# Altium PCB YakupTrkn.PcbDoc
Units mil, origin at the board's own origin, x right, y up, seen from the top; angles counter-clockwise.
Board outline 2010 x 2210 mil, 2 copper layers (Top Layer, Bottom Layer); 62 components, 57 nets, 268 pads, 44 vias.
Unrouted connection lines stored in the file: 4.
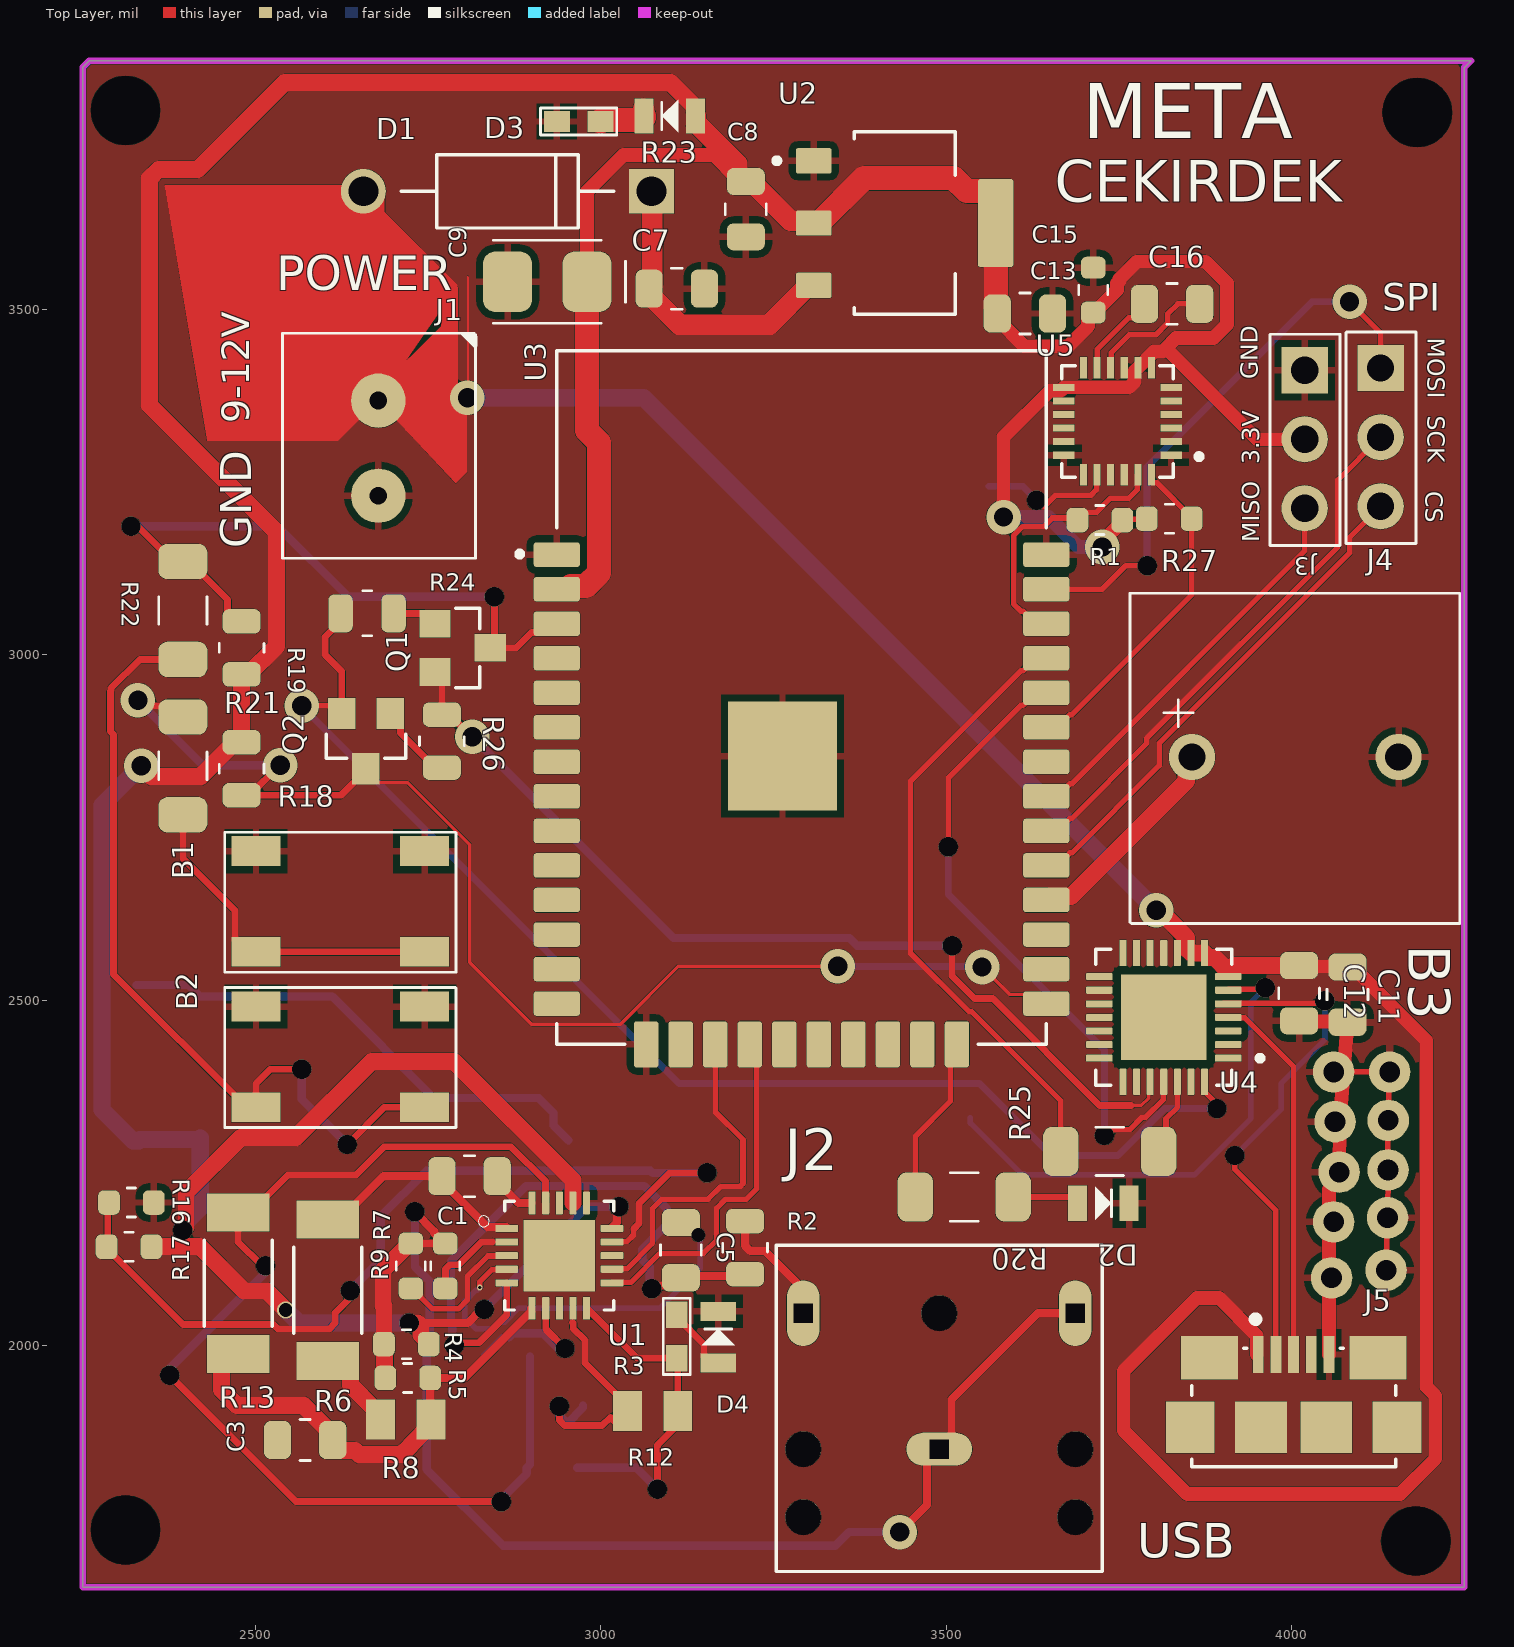
[diagram p0: Top Layer view]
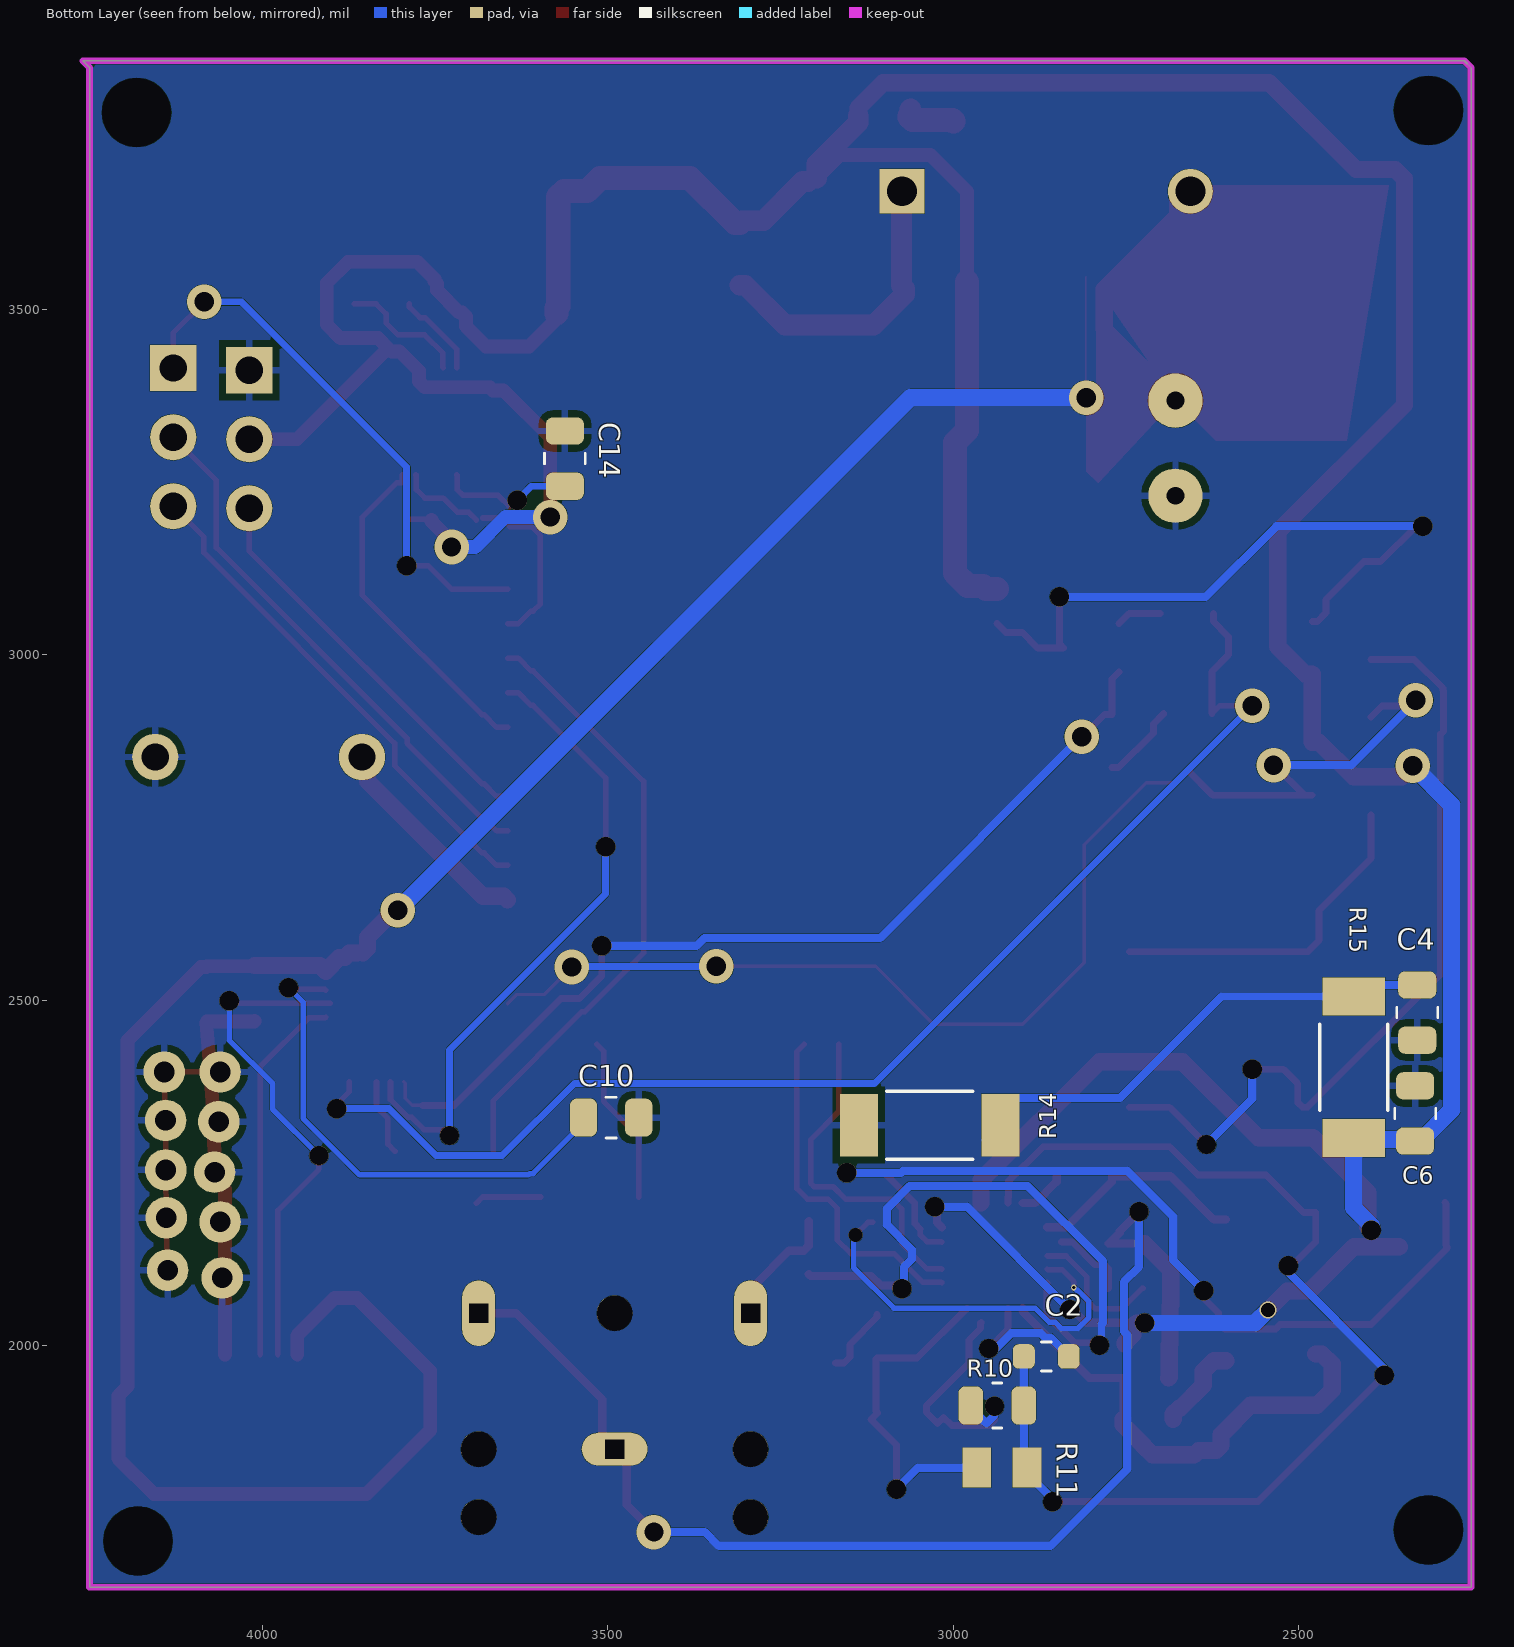
[diagram p1: Bottom Layer view, seen from below]
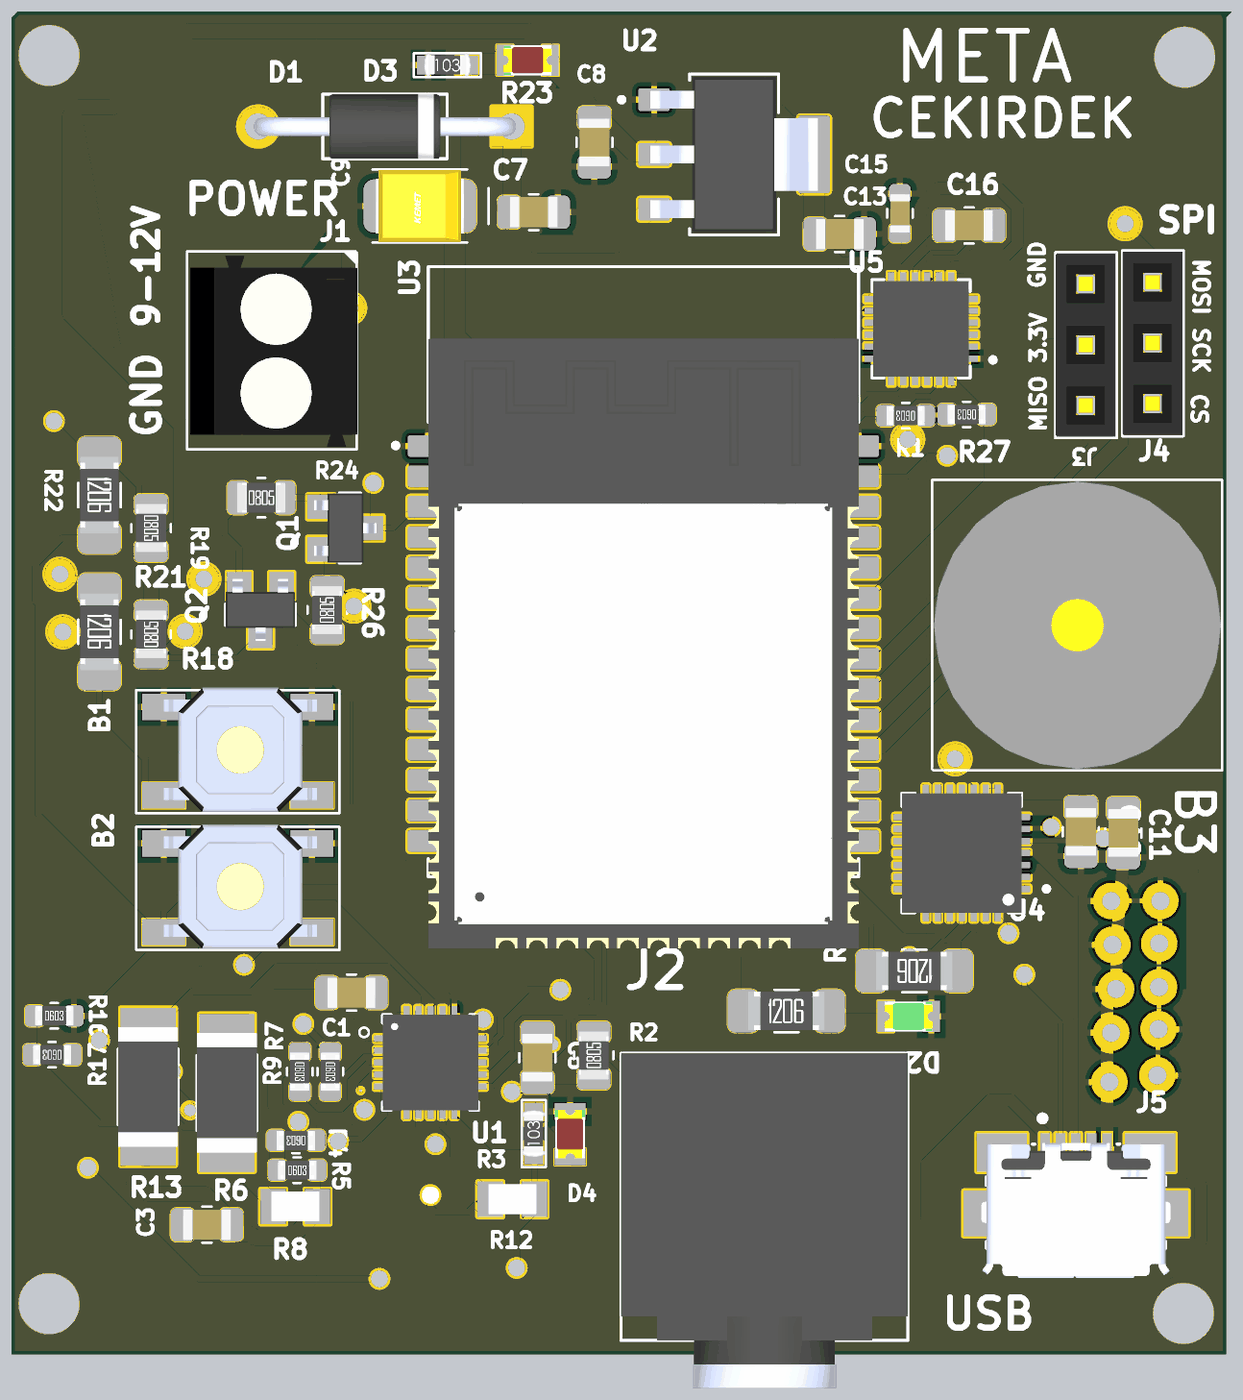
[diagram p2: 3D render of the assembled board from above, using the file's embedded part models]
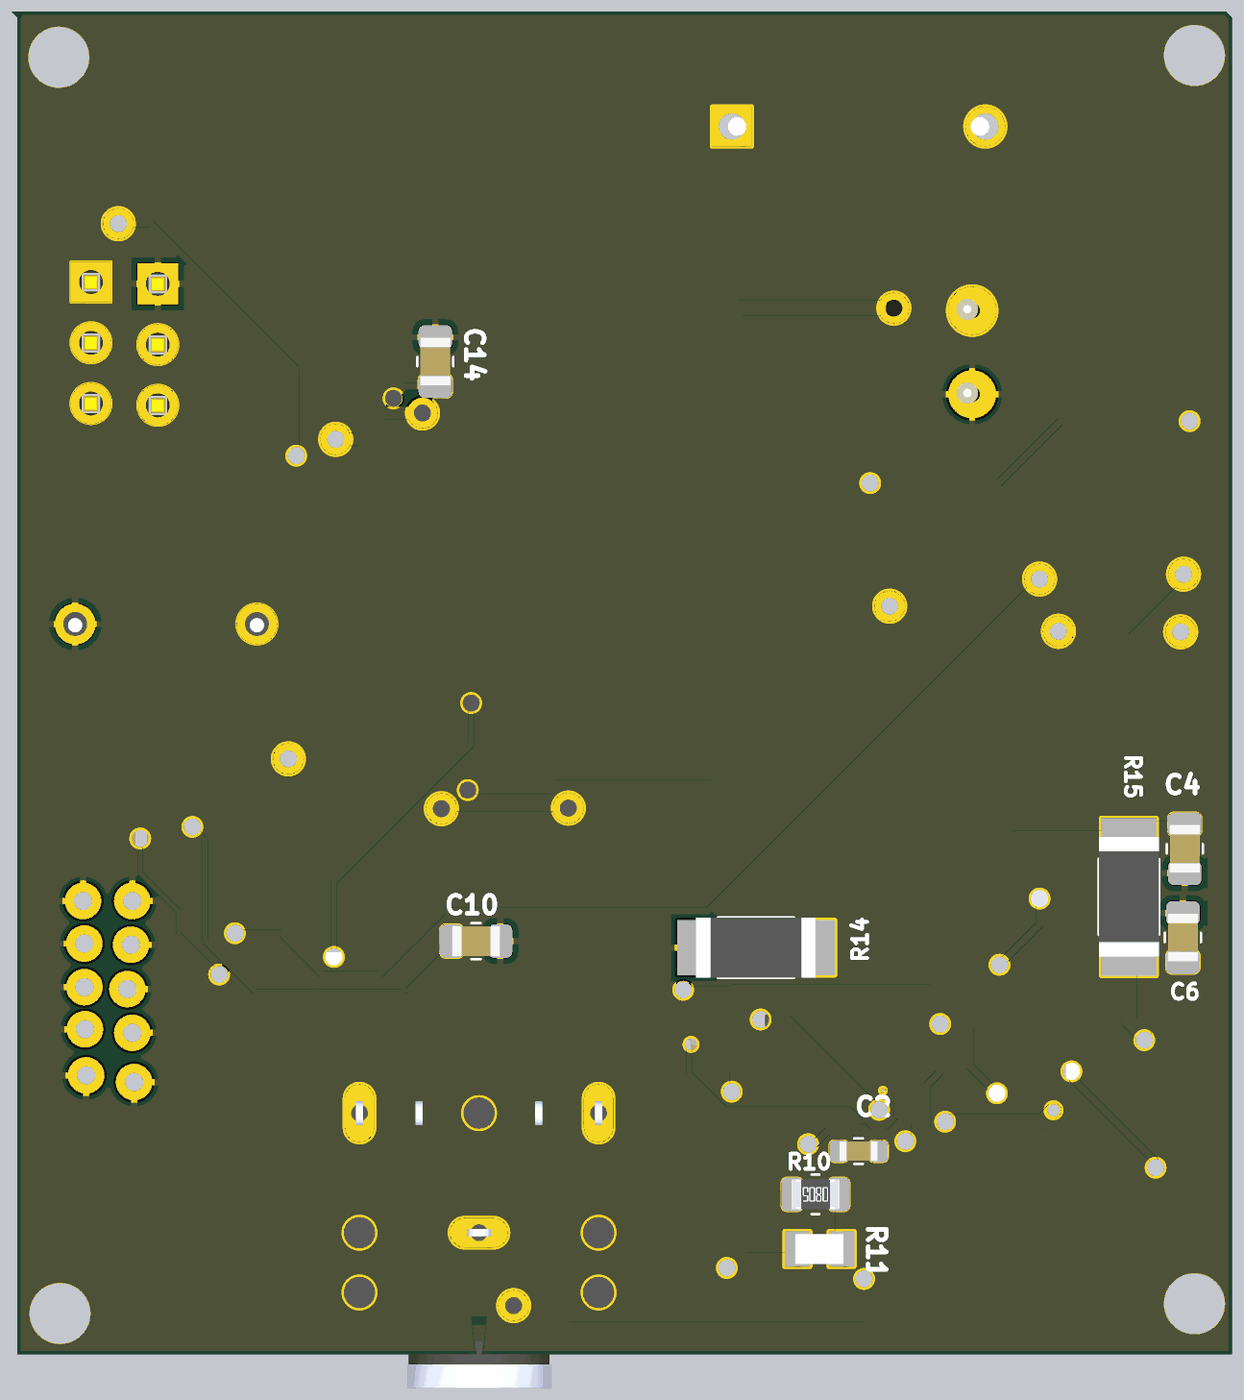
[diagram p3: 3D render of the assembled board from below, using the file's embedded part models]

## Layer stack, top to bottom
Top Solder: solder mask 0.4, Solder Resist, Dk 3.5
Top Layer: signal copper 1.4
Dielectric 1: dielectric 12.6, FR-4, Dk 4.8
Bottom Layer: signal copper 1.4
Bottom Solder: solder mask 0.4, Solder Resist, Dk 3.5

## Board outline
2250,1650 4250,1650 4250,3850 4260,3860 2260,3860 2250,3850

## Design rules (kind name [scope] priority, off if disabled: settings)
Clearance [All] p1: gap=0.15 ignorepadtopadclearanceinfootprint=FALSE except(0: Arc-Hole Track-Hole SMDPad-Hole THPad-Hole Via-Hole Fill-Hole Poly-Hole Region-Hole Text-Hole)
HoleSize [All] p1: absolutevalues=TRUE maxlimit=100 minlimit=0 maxpercent=80.000 minpercent=20.000
MinimumSolderMaskSliver [All] p1: minsoldermaskwidth=0.01
PolygonConnect [All] p1: connectstyle=Relief reliefconductorwidth=10 reliefentries=4 polygonreliefangle="90 Angle" airgapwidth=10
RoutingVias [All] p1: holewidth=28 width=50 viastyle="Through Hole" minholewidth=28 minwidth=50 maxholewidth=28 maxwidth=50
ShortCircuit [All] p1: allowed=TRUE
SilkToSilkClearance [All] p1: silktosilkclearance=0
SilkToSolderMaskClearance [IsPad] p1: minsilkscreentomaskgap=0 clearancetoexposedcopper=TRUE
SolderMaskExpansion [All] p1: expansion=4 istentingtop=FALSE
Width [All] p1: maxlimit=35 minlimit=5 preferedwidth=8 bottomlayer_minwidth=8 minimp=50.000000 maximp=50.000000 favimp=50.000000
25 further rules are at their usual default settings.

## Classes and differential pairs
component class YakupTrkn2: C13 C14 C15 C16 R1 R27 U5
component class YakupTrkn: B1 B2 B3 C7 C8 C9 C10 C11 C12 D1 D2 D3 J1 J3 J4 J5 Q1 Q2 R18 R19 R20 R21 R22 R23 R24 R25 R26 U2 U3 U4
component class YakupTrkn1: C1 C2 C3 C4 C5 C6 D4 J2 R3 R4 R5 R6 R7 R8 R9 R10 R11 R12 R13 R14 R15 R16 R17 U1

## Components (designator, comment, footprint, x,y, rotation, side; value= is the part's Value field where it differs from the comment)
B1 "Push Button" "PUSB BUTTON-SMD" 2745,2570 r180 top
B2 "Push Button" "PUSB BUTTON-SMD" 2745,2345 r180 top
B3 "Buzzer 5v" "Buzzer 5v" 3855.79,2852 r0 top
C1 "CL21B334KOCNNNC" SAMSUNG_CAP_0805_095 2810,2245.15 r180 top
C2 "CL10B103KB8NNNL" SAMSUNG_CAP_0603_090 2865,1984.15 r180 bottom
C3 "CL21B334KOCNNNC" SAMSUNG_CAP_0805_095 2572,1863.15 r180 top
C4 "CL21B104MACNNNC" SAMSUNG_CAP_0805_095 2328,2482 r270 bottom
C5 "CL21B102KBCNNNC" SAMSUNG_CAP_0805_095 3116,2138.15 r90 top
C6 "CL21B104MACNNNC" SAMSUNG_CAP_0805_095 2331,2336 r270 bottom
C7 "CL21B106KPQNNNE" SAMSUNG_CAP_0805_140 3110,3530 r180 top
C8 "CL21B106KPQNNNE" SAMSUNG_CAP_0805_140 3210,3645 r90 top
C9 "T491B107K006AT" KEMET_CAP_TAN-B 2922.52,3540 r180 top
C10 "CL21B105KBFNNNE" SAMSUNG_CAP_0805_135 3495,2330 r180 bottom
C11 "CL21B106KPQNNNE" SAMSUNG_CAP_0805_140 4081,2508 r270 top
C12 "CL21B222KBANNNC" SAMSUNG_CAP_0805_075 4011,2510 r90 top
C13 "CL21B104MACNNNC" SAMSUNG_CAP_0805_095 3614,3494 r180 top
C14 "CL21B222KBANNNC_1" SAMSUNG_CAP_0805_075 3562,3284 r270 bottom
C15 "CL10C010BB8NNNC" SAMSUNG_CAP_0603_090 3713,3528 r270 top
C16 "CL21B104MACNNNC" SAMSUNG_CAP_0805_095 3827,3508 r0 top
D1 "1N4007" DIOAD1060W80L520D270 2865,3671 r180 top
D2 "LTST-C171GKT" LED_GREEN_0805 3727.4,2206 r180 top
D3 "LH R974-LP-1" LED_RED_0805 3100,3780 r0 top
D4 "LH R974-LP-1" LED_RED_0805 3170,2012.15 r270 top
J1 "Klemens 1x2 3.5mm" "Klemens 1x2 - 3.5mm" 2680,3305 r270 top
J2 "FC68131" CLIFF_FC68131 3490,1850 r90 top
J3 "Header 2.54 1x3" "Header 2.54 1x3" 4019.98,3412 r270 top
J4 "Header 2.54 1x3" "Header 2.54 1x3" 4129.98,3415 r270 top
J5 "10118192-0001LF" AMPHENOL_10118192-0001LF 4003,1987 r0 top
Q1 "S8050" SOT-23 2800,3010 r270 top
Q2 "S8050" SOT-23 2660,2875 r180 top
R1 "0603SAJ0472TDE" ROYALOHM_RES_0603 3722.52,3195 r180 top
R2 "0805S8J0331T5E" ROYALOHM_RES_0805 3209,2141.76 r90 top
R3 "RC0603FR-0710KL" RES_0603 3110,2013.15 r90 top
R4 "0603SAJ0000TDE" ROYALOHM_RES_0603 2718.52,2002 r180 top
R5 "0603SAJ0000TDE" ROYALOHM_RES_0603 2720.52,1953 r0 top
R6 "ERJU1DJ205U" RES_ERJU1DJ205U 2605,2080.15 r270 top
R7 "0603SAJ0221T5E" ROYALOHM_RES_0603 2775,2115.15 r270 top
R8 "1Mohm" RESC2012X65N 2717.58,1893.15 r0 top
R9 "0603SAJ0221T5E" ROYALOHM_RES_0603 2725,2115.15 r270 top
R10 "0805S8J0104T5E" ROYALOHM_RES_0805 2936,1913.15 r0 bottom
R11 "1Mohm" RESC2012X65N 2929.42,1823.15 r0 bottom
R12 "1Mohm" RESC2012X65N 3075,1905.15 r0 top
R13 "ERJU1DJ205U" RES_ERJU1DJ205U 2475,2090.15 r270 top
R14 "" RES_ERJU1DJ205U 3034,2319.15 r180 bottom
R15 "" RES_ERJU1DJ205U 2420,2402.79 r90 bottom
R16 "0603SAJ0000TDE" ROYALOHM_RES_0603 2320.52,2207 r0 top
R17 "0603SAJ0000TDE" ROYALOHM_RES_0603 2317,2143 r180 top
R18 "0805S8J0103T5E" ROYALOHM_RES_0805 2480,2835 r90 top
R19 "0805S8J0103T5E" ROYALOHM_RES_0805 2480,3010 r270 top
R20 "1206S4F5100T5E" ROYALOHM_RES_1206 3526.13,2215 r0 top
R21 "1206S4F5100T5E" ROYALOHM_RES_1206 2395,2839.13 r270 top
R22 "1206S4F5100T5E" ROYALOHM_RES_1206 2395,3064.13 r270 top
R23 "RC0603FR-0710KL" RES_0603 2968,3772 r0 top
R24 "0805S8J0103T5E" ROYALOHM_RES_0805 2661.61,3060 r0 top
R25 "1206S4F5100T5E" ROYALOHM_RES_1206 3736.87,2281 r180 top
R26 "0805S8J0103T5E" ROYALOHM_RES_0805 2770,2875 r90 top
R27 "0603SAJ0472TDE" ROYALOHM_RES_0603 3823,3197 r180 top
U1 "AD8232ACPZ-R7" QFN50P400X400X100-21N 2940,2130.15 r0 top
U2 "AMS1117" SOT229P700X180-4N 3440,3625 r0 top
U3 "ESP-WROOM-32" MODULE_ESP-WROOM-32 3290.67,2820 r0 top
U4 "CP2102" QFN50P500X500X100-29N 3815,2475 r180 top
U5 "MPU-6050" QFN50P400X400X95-24N 3748,3338 r180 top

## Footprints (in the part's own frame and the unit in brackets; to place one, negate y for a bottom-side part, rotate by r counter-clockwise, add the part's x,y. Pads: shape width x height; smd on the part's side, far side on the other; paste and mask are expansions set on the pad)
AMPHENOL_10118192-0001LF [mm]
  rect 0.4x1.35 smd: 1(-1.3,0) 2(-0.65,0) 3(0,0) 4(0.65,0) 5(1.3,0)
  rect 2.1x1.6 smd: SH1(-3.1,-0.125) SH2(3.1,-0.125)
  rect 1.8x1.9 smd: SH3(-3.8,-2.675) SH6(3.8,-2.675)
  rect 1.9x1.9 smd: SH4(-1.2,-2.675) SH5(1.2,-2.675)
  silkscreen extent -3.75,-4.13 3.75,1.4, body extent -3.96,-5.4 3.96,0.27, height 2.5
"Buzzer 5v" [mm]
  round 1.7 hole 1 mask+0.05: 1(0,0) 2(7.6,0)
  silkscreen extent -2.27,-6.12 9.85,6.02, body extent -2.2,-6.05 9.8,5.95, height 9.5
CLIFF_FC68131 [mm]
  oval 1.208x2.416 hole 0.7 square: 1(0,0)
  oval 2.416x1.208 hole 0.7 square: 2(5,5) 5(5,-5)
  round 1.3 hole 1.3 unplated: ""(-2.5,5) ""(-2.5,-5) ""(0,5) ""(0,-5) ""(5,0)
  silkscreen extent -4.5,-6 7.5,6, body extent -6.5,-6 7.5,6, height 5.5
DIOAD1060W80L520D270 [mm]
  round 1.65 hole 1.1: A(5.3,0)
  rect 1.65x1.65 hole 1.1: C(-5.3,0)
  silkscreen extent -3.9,-1.35 3.9,1.35, body extent -5.47,-1.35 5.47,1.35, height 2.69
"Header 2.54 1x3" [mm]
  rect 1.7x1.7 hole 1 mask+0.05: 1(0,-0.025)
  round 1.7 hole 1 mask+0.05: 2(2.54,-0.025) 3(5.08,-0.025)
  silkscreen extent -1.33,-1.3 6.45,1.28, body extent -1.26,-1.27 6.36,1.23, height 9.1
KEMET_CAP_TAN-B [mm]
  rrect50% 1.8x2.23 smd paste+0 mask+0.04: 1(-1.46,0) 2(1.46,0)
  silkscreen extent -2.88,-1.53 1.98,1.53, body extent -1.85,-1.5 1.85,1.5, height 2.1
"Klemens 1x2 - 3.5mm" [mm]
  round 2 hole 0.65: 1(-1.6,-0.05) 2(1.9,-0.05)
  silkscreen extent -4.11,-3.58 4.2,3.58, body extent -3.9,-3.45 4.09,3.55, height 8.9
LED_GREEN_0805 [mm]
  rect 0.7x1.3 smd mask+0.05: 1(-0.95,0) 2(0.95,0)
  silkscreen extent -0.3,-0.6 0.3,0.6, body extent -1.01,-0.62 1.01,0.62, height 1.1
LED_RED_0805 [mm]
  rect 0.7x1.3 smd mask+0.05: 1(-0.95,0) 2(0.95,0)
  silkscreen extent -0.3,-0.6 0.3,0.6, body extent -1.01,-0.63 1.01,0.62, height 1.1
MODULE_ESP-WROOM-32 [mm]
  rrect22% 1.7x0.9 smd: 1(-9,8.255) 2(-9,6.985) 3(-9,5.715) 4(-9,4.445) 5(-9,3.175) 6(-9,1.905) 7(-9,0.635) 8(-9,-0.635) 9(-9,-1.905) 10(-9,-3.175) 11(-9,-4.445) 12(-9,-5.715) 13(-9,-6.985) 14(-9,-8.255) 25(9,-8.255) 26(9,-6.985) 27(9,-5.715) 28(9,-4.445) 29(9,-3.175) 30(9,-1.905) 31(9,-0.635) 32(9,0.635) 33(9,1.905) 34(9,3.175) 35(9,4.445) 36(9,5.715) 37(9,6.985) 38(9,8.255)
  rect 4x4 smd: 1.1(-0.7,0.845)
  rrect22% 0.9x1.7 smd: 15(-5.715,-9.755) 16(-4.445,-9.755) 17(-3.175,-9.755) 18(-1.905,-9.755) 19(-0.635,-9.755) 20(0.635,-9.755) 21(1.905,-9.755) 22(3.175,-9.755) 23(4.445,-9.755) 24(5.715,-9.755)
  silkscreen extent -10.46,-9.75 9,15.75, body extent -9,-12.75 9,12.75, height 3.25
"PUSB BUTTON-SMD" [mm]
  rect 1.8x1.1 smd mask+0.05: 1(0,0) 2(6.2,0) 3(0,-3.7) 4(6.2,-3.7)
  silkscreen extent -1.15,-4.4 7.35,0.75, body extent -0.2,-4.5 6.2,0.7, height 1.5
QFN50P400X400X95-24N [mm]
  rect 0.79x0.26 smd: 1(-1.97,1.25) 2(-1.97,0.75) 3(-1.97,0.25) 4(-1.97,-0.25) 5(-1.97,-0.75) 6(-1.97,-1.25) 13(1.97,-1.25) 14(1.97,-0.75) 15(1.97,-0.25) 16(1.97,0.25) 17(1.97,0.75) 18(1.97,1.25)
  rect 0.26x0.79 smd: 7(-1.25,-1.97) 8(-0.75,-1.97) 9(-0.25,-1.97) 10(0.25,-1.97) 11(0.75,-1.97) 12(1.25,-1.97) 19(1.25,1.97) 20(0.75,1.97) 21(0.25,1.97) 22(-0.25,1.97) 23(-0.75,1.97) 24(-1.25,1.97)
  silkscreen extent -3.1,-2.05 2.05,2.05, body extent -2,-2 2,2, height 0.93
QFN50P400X400X100-21N [mm]
  rrect25% 0.84x0.26 smd: 1(-1.935,1) 2(-1.935,0.5) 3(-1.935,0) 4(-1.935,-0.5) 5(-1.935,-1) 11(1.935,-1) 12(1.935,-0.5) 13(1.935,0) 14(1.935,0.5) 15(1.935,1)
  rrect25% 0.26x0.84 smd: 6(-1,-1.935) 7(-0.5,-1.935) 8(0,-1.935) 9(0.5,-1.935) 10(1,-1.935) 16(1,1.935) 17(0.5,1.935) 18(0,1.935) 19(-0.5,1.935) 20(-1,1.935)
  rect 2.63x2.63 smd paste-2: 21(0,0)
  silkscreen extent -2.97,-2 2,2, body extent -2,-2 2,2, height 0.8
QFN50P500X500X100-29N [mm]
  rrect25% 0.97x0.26 smd: 1(-2.37,1.5) 2(-2.37,1) 3(-2.37,0.5) 4(-2.37,0) 5(-2.37,-0.5) 6(-2.37,-1) 7(-2.37,-1.5) 15(2.37,-1.5) 16(2.37,-1) 17(2.37,-0.5) 18(2.37,0) 19(2.37,0.5) 20(2.37,1) 21(2.37,1.5)
  rrect25% 0.26x0.97 smd: 8(-1.5,-2.37) 9(-1,-2.37) 10(-0.5,-2.37) 11(0,-2.37) 12(0.5,-2.37) 13(1,-2.37) 14(1.5,-2.37) 22(1.5,2.37) 23(1,2.37) 24(0.5,2.37) 25(0,2.37) 26(-0.5,2.37) 27(-1,2.37) 28(-1.5,2.37)
  rect 3.15x3.15 smd paste-575: 29(0,0)
  silkscreen extent -3.64,-2.5 2.5,2.5, body extent -2.5,-2.5 2.5,2.5, height 1
RES_0603 [mil]
  rect 38x31 smd mask+1.97: 1(-31.5,0) 2(31.5,0)
  silkscreen extent -55,-20 55,20, body extent -39,-19 39,20, height 17
RES_ERJU1DJ205U [mm]
  rect 1.4x2.3 smd: 1(-2.6,0) 2(2.6,0)
  silkscreen extent -1.58,-1.25 1.58,1.25, body extent -2.5,-1.25 2.5,1.25, height 0.6
RESC2012X65N [mm]
  rect 1.06x1.47 smd: 1(-0.925,0) 2(0.925,0)
  body extent -1,-0.63 1,0.63, height 0.65
ROYALOHM_RES_0603 [mm]
  rrect50% 0.8x0.9 smd paste+0 mask+0.04: 1(-0.825,0) 2(0.825,0)
  silkscreen extent -0.15,-0.53 0.15,0.53, body extent -0.8,-0.4 0.8,0.4, height 0.45
ROYALOHM_RES_0805 [mm]
  rrect50% 0.9x1.397 smd paste+0 mask+0.04: 1(-0.975,0) 2(0.975,0)
  silkscreen extent -0.16,-0.83 0.16,0.83, body extent -1,-0.62 1,0.63, height 0.6
ROYALOHM_RES_1206 [mm]
  rrect50% 1.3x1.8 smd paste+0 mask+0.04: 1(-1.8,0) 2(1.8,0)
  silkscreen extent -0.51,-0.89 0.51,0.89, body extent -1.6,-0.8 1.6,0.8, height 0.6
SAMSUNG_CAP_0603_090 [mm]
  rrect50% 0.8x0.9 smd paste+0 mask+0.04: 1(-0.825,0) 2(0.825,0)
  silkscreen extent -0.18,-0.53 0.18,0.53, body extent -0.8,-0.41 0.8,0.41, height 0.81
SAMSUNG_CAP_0805_075 [mm]
  rrect50% 1x1.4 smd paste+0 mask+0.04: 1(-1.016,0) 2(1.016,0)
  silkscreen extent -0.19,-0.75 0.19,0.75, body extent -1,-0.64 1,0.64, height 0.76
SAMSUNG_CAP_0805_095 [mm]
  rrect50% 1x1.4 smd paste+0 mask+0.04: 1(-1.016,0) 2(1.016,0)
  silkscreen extent -0.19,-0.75 0.19,0.75, body extent -1,-0.63 1,0.64, height 0.96
SAMSUNG_CAP_0805_135 [mm]
  rrect50% 1x1.4 smd paste+0 mask+0.04: 1(-1.016,0) 2(1.016,0)
  silkscreen extent -0.19,-0.75 0.19,0.75, body extent -1,-0.64 1,0.63, height 1.36
SAMSUNG_CAP_0805_140 [mm]
  rrect50% 1x1.4 smd paste+0 mask+0.04: 1(-1.016,0) 2(1.016,0)
  silkscreen extent -0.19,-0.75 0.19,0.75, body extent -1,-0.64 1,0.64, height 1.41
SOT229P700X180-4N [mm]
  rrect15% 1.31x0.93 smd: 1(-3.345,2.29) 2(-3.345,0) 3(-3.345,-2.29)
  rrect15% 1.31x3.24 smd: 4(3.345,0)
  silkscreen extent -4.8,-3.36 1.86,3.36, body extent -3.5,-3.25 3.5,3.25, height 1.8
SOT-23 [mil]
  rect 40x45 smd: 1(-35,-40) 2(35,-40) 3(0,40)
  silkscreen extent -58,-10 58,25, body extent -57,-51 57,51, height 55

## Part data
B1 B2: "Smd Push Button", Satın Alma Linki=https://urun.n11.com/diger/mini-pushbutton-switch-smd-P227461537?gclid=Cj0KCQjwkoDmBRCcARIsAG3xzl8Y_-jeD7HocNM6lvuZ_rVp83568XPGtNzlPwXWLph8oCRqo0yh87UaApZYEALw_wcB&gclsrc=aw.ds
C1 C3: "CAP CER 0.33UF 16V X7R 0805", Capacitance="330 nF", Supplier Part Number 1=1276-1797-1-ND, Supplier 1=Digi-Key, Supplier 2=Mouser, Supplier 3="Arrow Electronics", Supplier Part Number 2=187-CL21B334KOCNNNC, Supplier Part Number 3=CL21B334KOCNNNC
C2: "CAP CER 10000PF 50V X7R 0603", Capacitance="10 nF", Supplier Part Number 1=187-CL10B103KB8NNNL, Supplier 1=Mouser
C4 C6 C13 C16: "CAP CER 0.1UF 25V X7R 0805", Capacitance="0.1 µF", Supplier Part Number 1=1276-2449-1-ND, Supplier 1=Digi-Key, Supplier 2=Mouser, Supplier 3="Arrow Electronics", Supplier Part Number 2=187-CL21B104MACNNNC, Supplier Part Number 3=CL21B104MACNNNC
C5: "CAP CER 1000PF 50V X7R 0805", Capacitance="1 nF", Supplier Part Number 1=1276-2425-1-ND, Supplier 1=Digi-Key, Supplier 2=Farnell, Supplier 3=Mouser, Supplier Part Number 2=3013468, Supplier Part Number 3=187-CL21B102KBCNNNC
C7 C8 C11: "CAP CER 10UF 10V X7R 0805", Capacitance="10 µF", Supplier Part Number 1=1276-1764-6-ND, Supplier 1=Digi-Key, Supplier 2=Farnell, Supplier 3=Mouser, Supplier Part Number 2=3013487, Supplier Part Number 3=187-CL21B106KPQNNNE
C9: "CAP TANT 100UF 10% 6.3V 1411", Capacitance="100 µF", Supplier Part Number 1=399-8301-1-ND, Supplier 1=Digi-Key, Supplier 2=Farnell, Supplier 3=Mouser, Supplier Part Number 2=1457438, Supplier Part Number 3=80-T491B107K006
C10: "CAP CER 1UF 50V X7R 0805", Capacitance="1 µF", Supplier Part Number 1=1276-1029-1-ND, Supplier 1=Digi-Key, Supplier 2=Farnell, Supplier 3=Mouser, Supplier Part Number 2=3013482, Supplier Part Number 3=187-CL21B105KBFNNNE
C12: "CAP CER 100NnF 50V X7R 0805", Capacitance="100 nF", Supplier Part Number 1=1276-1171-1-ND, Supplier 1=Digi-Key, Supplier 2=Farnell, Supplier 3=Mouser, Supplier Part Number 2=3013488, Supplier Part Number 3=187-CL21B222KBANNNC
C14: "CAP CER 2200PF 50V X7R 0805", Capacitance="2.2 nF", Supplier Part Number 1=1276-1171-1-ND, Supplier 1=Digi-Key, Supplier 2=Farnell, Supplier 3=Mouser, Supplier Part Number 2=3013488, Supplier Part Number 3=187-CL21B222KBANNNC
C15: "CAP CER 1PF 50V C0G/NP0 0603", Capacitance="1 pF", Supplier Part Number 1=1276-1095-1-ND, Supplier 1=Digi-Key, Supplier 2="Arrow Electronics", Supplier Part Number 2=CL10C010BB8NNNC
D1: "Diode Switching 1KV 1A 2-Pin DO-41", Package=None, Availability=Unavailable, MF="{'manufacturer': u'ON Semiconductor'}", MP=1N4007, Price=None
D2: library part "LED GREEN 0805", "Green 0805 130 º Min 5 mcd Typical 12 mcd Water Clear Lens SMT LED", Case Code (Metric)=2012, Case Code (Imperial)=0805, Color=Green, Forward Current=30mA, Forward Voltage=2.1V, Lens Color=Colorless, Manufacturer="Vishay Lite-On", Max Operating Temperature=85°C, Min Operating Temperature=-55°C, Package Quantity=1, Power Dissipation=100mW, Reverse Voltage=5V, Supplier Part Number 1=160-1423-1-ND, Test Current=10mA, Case/Package=0805, Category=LEDs, ComponentLink1Description=https://datasheet.ciiva.com/2110/ltst-c171gkt-2110000.pdf?src-supplier=Digi-Key, ComponentLink1URL=https://datasheet.ciiva.com/2110/ltst-c171gkt-2110000.pdf?src-supplier=Digi-Key, ComponentLink2Description=https://datasheet.ciiva.com/11773/0900766b80dc0296-11773991.pdf?src-supplier=RSComponents, ComponentLink2URL=https://datasheet.ciiva.com/11773/0900766b80dc0296-11773991.pdf?src-supplier=RSComponents, ComponentLink3Description=https://datasheet.ciiva.com/12400/lite-on-ltst-c171gkt-190133-12400647.pdf?src-supplier=Mouser, ComponentLink3URL=https://datasheet.ciiva.com/12400/lite-on-ltst-c171gkt-190133-12400647.pdf?src-supplier=Mouser, ComponentLink4Description=https://datasheet.ciiva.com/2110/ltst-c171gkt-2110001.pdf?src-supplier=Digi-Key, ComponentLink4URL=https://datasheet.ciiva.com/2110/ltst-c171gkt-2110001.pdf?src-supplier=Digi-Key, ComponentLink5Description=https://datasheet.ciiva.com/2110/ltst-c171gkt-2110002.pdf?src-supplier=Digi-Key, ComponentLink5URL=https://datasheet.ciiva.com/2110/ltst-c171gkt-2110002.pdf?src-supplier=Digi-Key, ComponentLink6Description=https://datasheet.ciiva.com/16396/ltst-c171gkt-16396549.pdf?src-supplier=Future+Electronics, ComponentLink6URL=https://datasheet.ciiva.com/16396/ltst-c171gkt-16396549.pdf?src-supplier=Future+Electronics, Depth=1.25mm, Designed by=BERK, Dominant Wavelength=569nm, Height=0.8mm, Lead Free="Lead Free", Length=2mm, Lens Style=Diffused,Colorless,Rectangular,Clear, Lens Transparency=Clear, Luminous Intensity=12mcd, Manufacturer Part Number=LTST-C171GKT, Mount="Surface Mount", Number of Elements=1, Number of LEDs=1, Number of Pins=2, Packaging="Tape and Reel", Power Rating=100mW, Pricing 1="1=0,26000, 10=0,14100, 100=0,06560, 500=0,06060, 1000=0,04747 (USD)", Radiation Hardening=No, RoHS=Yes, RoHS Compliant=Yes, Series="CHIPLED 0805", Stock 1=159023, Supplier 1=Digi-Key, Viewing Angle=130°, Wavelength=585nm, Width=1.25mm, Illumination Color=Green
D3 D4: library part "LED RED 0805", "LED Uni-Color Hyper Red 660nm 2-Pin Chip 0805(2012Metric) T/R", Case Code (Metric)=2012, Case Code (Imperial)=0805, Color=Red, Forward Current=30mA, Forward Voltage=1.8V, Lens Color=White, Manufacturer="Osram Opto", Max Operating Temperature=85°C, Min Operating Temperature=-30°C, Package Quantity=1, Reverse Voltage=5V, Supplier Part Number 1=475-1415-1-ND, Test Current=20mA, Case/Package=0805, Category=LEDs, ComponentLink1Description=http://www.jameco.com/Jameco/Products/ProdDS/2085634.pdf?src-supplier=Jameco, ComponentLink1URL=http://www.jameco.com/Jameco/Products/ProdDS/2085634.pdf?src-supplier=Jameco, ComponentLink2Description=http://components.arrow.com/part/dataview/0323_01825492?src-supplier=Arrow+Europe, ComponentLink2URL=http://components.arrow.com/part/dataview/0323_01825492?src-supplier=Arrow+Europe, ComponentLink3Description=https://dammedia.osram.info/media/resource/hires/osram-dam-2493888/LH%20R974.pdf?src-supplier=Digi-Key, ComponentLink3URL=https://dammedia.osram.info/media/resource/hires/osram-dam-2493888/LH%20R974.pdf?src-supplier=Digi-Key, ComponentLink4Description=http://www.mouser.com/ds/2/311/LH%20R974%20-%20CHIPLED%200805-318659.pdf?src-supplier=Mouser, ComponentLink4URL=http://www.mouser.com/ds/2/311/LH%20R974%20-%20CHIPLED%200805-318659.pdf?src-supplier=Mouser, ComponentLink5Description=https://www.verical.com/server-webapp/html/getDatasheet?partID=258950&src-supplier=Verical, ComponentLink5URL=https://www.verical.com/server-webapp/html/getDatasheet?partID=258950&src-supplier=Verical, ComponentLink6Description=http://components.arrow.com/part/dataview/41971690S1077610N9133?src-supplier=Arrow+Electronics, ComponentLink6URL=http://components.arrow.com/part/dataview/41971690S1077610N9133?src-supplier=Arrow+Electronics, ComponentLink7Description=http://components.arrow.com/part/dataview/41971690S6190115N2128?src-supplier=Arrow+Electronics, ComponentLink7URL=http://components.arrow.com/part/dataview/41971690S6190115N2128?src-supplier=Arrow+Electronics, Depth=1.35mm, Designed by=BERK, Dominant Wavelength=645nm, Length=2.1mm, Lens Size=1.25mm, Lens Style=Diffused,Flat,Colorless, Lens Transparency=Diffused, Luminous Flux=0.17lm, Luminous Intensity=71mcd, Manufacturer Part Number="LH R974-LP-1", Mount="Surface Mount", Number of Elements=1, Number of Pins=2, Packaging="Tape and Reel", Pricing 1="1=0,26000, 10=0,13900, 100=0,06480, 500=0,05978, 1000=0,04683, 2000=0,04584 (USD)", Radiation Hardening=No, RoHS=Yes, RoHS Compliant=Yes, Series=CHipLED, Stock 1=35632, Supplier 1=Digi-Key, Viewing Angle=160°, Width=1.25mm, Illumination Color=Red
J2: "Stereo Jack, 3.5mm, 3pos, Pcb", Package=None, Availability=Unavailable, MF="{'manufacturer': u'Cliff'}", MP=FC68131, Price=None
J5: "Single Port 5 Contact Horizontal Right Angle Shielded Micro B USB 2.0 Connector", Package=None, Availability=Unavailable, MF="{'manufacturer': u'FCI'}", MP=10118192-0001LF, Price=None
Q1 Q2: library part SMD-TRANSISTORS-NPN-25V-500MW(SOT-23), "305010017", Package=None, Availability=Unavailable, MF="{'manufacturer': u'UMW'}", MP=S8050, Price=None
R1 R27: "RES SMD 4.7K OHM 5% 1/10W 0603", Resistance="4.7 k"
R2: "RES SMD 330R OHM 5% 1/8W 0805", Resistance=330
R3 R23: library part "RES 1K OHM 0603", "RES 1K %1 OHM 0603 SMD", Case Code (Metric)=1608, Case Code (Imperial)=0603, Manufacturer=Yageo, Manufacturer Part Number=RC0603JR-071KL, Max Operating Temperature=155°C, Min Operating Temperature=-55°C, Package Quantity=5000, Power Rating=100mW, Resistance=1kR, Resistance Tolerance=5%, Resistor Type="Thick Film", Supplier Part Number 1=311-1.0KGRCT-ND, Temperature Coefficient=100ppm/°C, Voltage Rating=50V, Body Length=1.6mm, Case/Package=0603, Category="Chip SMD Resistors", ComponentLink1Description=https://datasheet.ciiva.com/8883/pyu-rc0603-51-rohs-l-4-8883051.pdf?src-supplier=Avnet, ComponentLink1URL=https://datasheet.ciiva.com/8883/pyu-rc0603-51-rohs-l-4-8883051.pdf?src-supplier=Avnet, ComponentLink2Description=https://datasheet.ciiva.com/7746/443971-7746461.pdf?src-supplier=Element14, ComponentLink2URL=https://datasheet.ciiva.com/7746/443971-7746461.pdf?src-supplier=Element14, ComponentLink3Description=https://datasheet.ciiva.com/22747/443971-22747533.pdf?src-supplier=Element14, ComponentLink3URL=https://datasheet.ciiva.com/22747/443971-22747533.pdf?src-supplier=Element14, ComponentLink4Description=https://datasheet.ciiva.com/7746/443971-7746462.pdf?src-supplier=Element14, ComponentLink4URL=https://datasheet.ciiva.com/7746/443971-7746462.pdf?src-supplier=Element14, Construction=Rectangular, Contact Plating=Tin,Matte, Depth=0.8mm, Designed by=BERK, Height=0.45mm, Lead Free="Lead Free", Length=1.6mm, Military Standard=Not, Number of Pins=2, Packaging="Tape and Reel", Pricing 1="1=0,10000, 10=0,01900, 100=0,00770, 1000=0,00344, 2500=0,00298 (USD)", Radiation Hardening=No, REACH SVHC=Unknown, RoHS=Yes, RoHS Compliant=Yes, Series=RC, Size Code=0603, Stock 1=5112056, Supplier 1=Digi-Key, Termination=SMD/SMT, Tolerance=5%, Voltage Rating (DC)=50V, Width=0.8mm
R4 R5 R16 R17: "RES SMD 0 OHM 5% 1/10W 0603", Resistance=0
R6 R13 U1: Package=None, Availability=Unavailable, Price=None
  R6 R13: MF="{'manufacturer': u'Panasonic'}", MP=ERJU1DJ205U
  U1: MF="{'manufacturer': u'Analog Devices'}", MP=AD8232ACPZ-R7
R7 R9: "RES SMD 220R OHM 5% 1/10W 0603", Resistance=220
R8 R11 R12: library part RNCS0805BKE1M00, Package=None, Availability=Unavailable, MF="{'manufacturer': u'Stackpole Electronics Inc'}", MP=RNCS0805BKE1M00, Price=None
R10: "RES SMD 100K OHM 5% 1/8W 0805", Resistance="100 k"
R14 R15: library part ERJU1DJ205U, Package=None, Availability=Unavailable, MF="{'manufacturer': u'Panasonic'}", MP=ERJU1DJ205U, Price=None
R18 R19 R24 R26: "RES SMD 10K OHM 5% 1/8W 0805", Resistance="10 k"
R20 R21 R22 R25: "RES SMD 510 OHM 1% 1/4W 1206", Resistance=510
U2: "Sot223/Pkg 1-Amp 5-Volt Low Drop Out Voltage Regulatator", Package=None, Availability=Unavailable, MF="{'manufacturer': u'Advanced Monolithic Systems'}", MP=AMS1117, Price=None
U3: "Module: combo; GPIO, I2C x2, I2S x2, SDIO, SPI x3, UART x3; 19.5dBm", Package=None, Availability=Unavailable, MF="{'manufacturer': u'Olimex LTD'}", MP=ESP-WROOM-32, Price=None
U4: "USB to UART Bridge", Package=None, Availability=Unavailable, MF="{'manufacturer': u'Silicon Labs'}", MP=CP2102, Price=None
U5: "MPU-6050 Six-Axis (Gyro + Accelerometer) MEMS MotionTrackingâ„¢ Devices", Package=None, Availability=Unavailable, MF="{'manufacturer': u'TDK InvenSense'}", MP=MPU-6050, Price=None

## Free pads (board coordinates)
  round 60 hole 30: 2(4142,2396) 3(4140,2326) 4(4139.75,2254.25) 5(4139,2185) 6(4137,2109) 7(4061,2396) 8(4063,2324) 9(4069,2251) 10(4061,2179) 11(4058,2098)
  round 0 hole 100: 5(2312,1733) 5(2312,3788) 5(4180,1717) 5(4182,3785)

## Via types
v1: diameter 28, hole 28, Top Layer to Bottom Layer, 28 vias
v2: diameter 50, hole 28, Top Layer to Bottom Layer, 13 vias
v3: diameter 20, hole 20, Top Layer to Bottom Layer, 1 vias
v4: diameter 8, hole 5, Top Layer to Bottom Layer, 1 vias
v5: diameter 25, hole 20, Top Layer to Bottom Layer, 1 vias

## Nets (pads, with @x,y where several pads share a name; then routed paths per layer and width w, separated by ;. In a path a pad name is that pad's centre, name@x,y a point inside that pad or via, vN(x,y) a via of type N, cw(c..) or ccw(c..) an arc to the next point about the centre after c; other vN are vias at no path point)
+VS: C6.2 C8.2 C9.1 C13.2 C15.2 D3.2 J3.2 R1.1 R4.1 R15.1 R17.1 R18.2 R19.2 R27.2 U1.15 U1.17 U2.2 U2.4 U3.2 U5.8 U5.13 | length 7563.7
  Top Layer w8: R1.1 3756,3196 3789.52,3196 R27.2
  Top Layer w12: 2747.81,2032.92 2807.59,2032.92 2826.93,2052.26 v1(2831.26,2052.26) ; U1.15@3016.18,2170.95 3023.28,2178.05 3023.28,2197.94 v1(3026.34,2201)
  Top Layer w20: C9.1 2980,3670.58 3032.9,3723.48 3163.65,3723.48 3197.44,3689.69 3202.13,3685 C8.2 ; C13.2 3574,3486.13 3613.69,3446.44 3676.2,3446.44 3705.28,3475.52 3705.28,3489.77 3711.03,3495.52 C15.2 3714.97,3495.52 3747.31,3527.87 3747.31,3537.66 3750.72,3541.06 3750.72,3544.05 3775.55,3568.88 3875.88,3568.88 3906.69,3538.08 3906.69,3477.92 3887.28,3458.52 3832.73,3458.52 3817.97,3443.75 ; v2(3583.11,3199.33) 3583.11,3315.22 3650.69,3382.8 3666.02,3382.8 U5.13 3764.52,3387.21 3773.11,3395.8 3773.11,3411.14 U5.8 3801.08,3439.11 3813.33,3439.11 3817.97,3443.75 ; v2(3726,3156) 3726,3164.03 3755,3193.03 R1.1 ; J3.2 3949.73,3312 3817.97,3443.75
  Top Layer w25: v2(2334.71,2839.13) 2334.71,2838.71 2350.07,2823.34 2420.17,2823.34 2470.22,2873.39 R18.2 R19.2 2489.78,2971.61 2530,3011.83 2530,3178.18 2346.5,3361.68 2346.5,3689.32 2359.68,3702.5 2416.5,3702.5 2542.09,3828.09 3101.12,3828.09 3137.4,3791.81 D3.2 ; R17.1@2354,2143.15 2419.71,2143.15 2483.84,2079.02 2516.54,2079.02 v5(2544.06,2051.5) ; v1(2394.72,2167) 2399.51,2171.78 2399.51,2221.67 2478.68,2300.85 2557.85,2300.85 2668,2411 2788.05,2411 2959.68,2239.37 ; v1(2722.54,2032.72) 2734.21,2032.72 2739.79,2027.14 2739.79,2015.18 2751,2003.97 R4.1 ; U1.17 2959.68,2239.31
  Top Layer w30: D3.2 3137.4,3770.63 3197.44,3710.59 C8.2@3197.44,3689.69 ; C8.2 3217.87,3685 3274.57,3628.31 3305,3628.31 U2.2
  Top Layer w35: U3.2 2952.09,3095 2956.87,3099.78 2978.91,3099.78 2997.3,3118.18 2997.3,3307.25 2980,3324.55 C9.1 ; U2.2 3315.79,3625 3380.79,3690 3511,3690 3529.72,3671.28 3563.41,3671.28 3571.69,3662.99 U2.4 3571.69,3504.18 3574,3501.87 C13.2
  Bottom Layer w12: v1(2831.26,2052.26) 2980,2201 v1(3026.34,2201)
  Bottom Layer w20: v2(3583.11,3199.33) 3648.29,3199.33 3691.61,3156 v2(3726,3156)
  Bottom Layer w25: v2(2334.71,2839.13) 2277.94,2782.37 2277.94,2341.19 2323.13,2296 C6.2 2333.21,2298.21 2417.79,2298.21 R15.1 2420,2199.04 2394.72,2173.76 v1(2394.72,2167) ; v5(2544.06,2051.5) 2562.84,2032.72 v1(2722.54,2032.72)
AC/DC: R16.1 R17.2 U1.14 | length 1334.2
  Top Layer w8: U1.14 3016.75,2150.4 3037.77,2150.4 3047.72,2160.35 3047.72,2168.87
  Top Layer w10: R16.1 2286.28,2205.24 2286.28,2144.76 R17.2 2284.52,2141.03 2395.2,2030.35 2526.49,2030.35 2532.84,2024 2607,2024 2615.49,2032.49 2615.49,2046.8 2637.28,2068.6 v1(2637.28,2079.42) ; 3047.72,2168.87 3055.44,2176.59 3055.44,2205.74 3099.58,2249.87 v1(3153.85,2249.87)
  Bottom Layer w12: v1(2637.28,2079.42) 2681.44,2123.58 2681.44,2186.68 2747.76,2253 3072.11,2253 3075.24,2249.87 v1(3153.85,2249.87)
ACTIVITE: U4.11
BUZZER: B3.1 U3.28 | length 312.3
  Top Layer w25: U3.28 3650.22,2650.22 3680.93,2650.22 3847.76,2817.05 3847.76,2843.98 B3.1
CS: J4.3 U3.29 | length 731.4
  Top Layer w8: U3.29 3660.75,2695 3679.03,2713.28 3681.98,2713.28 3808.32,2839.63 3808.32,2871.66 4084.46,3147.8 4084.46,3170.46 J4.3
CTS: U4.23
D+: J5.3 U4.4 | length 541
  Top Layer w8: U4.4 3908.87,2474.43 3932.45,2474.43 4003,2403.88 J5.3
D-: J5.2 U4.5 | length 738
  Top Layer w8: U4.5@3902,2495.25 4044.25,2495.25 v1(4048,2499) ; v1(3918,2275) 3918,2255 3977.41,2195.59 J5.2
  Bottom Layer w8: v1(3918,2275) 3984.91,2341.91 3984.91,2379.25 4048,2442.33 v1(4048,2499)
DCD: U4.1
DSR: U4.27
DTR: Q2.2 R24.1 U4.28 | length 1895.7
  Top Layer w8: v2(2567,2926) 2614,2926 Q2.2 ; U4.28 3874.06,2367.72 3892,2349.77 v1(3892,2343)
  Top Layer w10: R24.1 2623.23,3048.13 2601,3025.9 2601,3000 2625,2976 Q2.2
  Bottom Layer w10: v2(2567,2926) 3113.57,2379.43 3548.27,2379.43 3652.69,2275 3748.43,2275 3816.43,2343 v1(3892,2343)
EN: Q1.3 R19.1 R22.1 U3.3 | length 983.8
  Top Layer w10: v1(2320,3186) 2329.94,3186 2380.94,3135 R22.1 2404.84,3135 2459.88,3079.96 2459.88,3060.81 2472.3,3048.39 R19.1 ; v1(2846,3084) 2846,3016 Q1.3 2877.5,3010 2899.78,3032.28 2923.62,3032.28 U3.3
  Bottom Layer w12: v1(2320,3186) 2532,3186 2634,3084 v1(2846,3084)
FSYNC: C16.1 U5.11 | length 125.1
  Top Layer w8: U5.11 3718.47,3442.11 3764.41,3488.05 3771.76,3488.05 3787,3503.29 C16.1
GND: B1.3 B1.4 B2.3 B2.4 B3.2 C4.2 C6.1 C7.1 C8.1 C9.2 C10.2 C11.2 C12.1 C13.1 C14.1 C15.1 D2.1 D4.1 J1.2 J3.1 J5.5 pad.2 pad.3 pad.4 pad.5@4139,2185 pad.6 pad.7 pad.8 pad.9 pad.10 pad.11 R14.1 R16.2 R23.1 U1.16 U2.1 U3.1 U3.1.1 U3.15 U3.38 U4.3 U4.29 U5.1 U5.18 | length 926.2
  Top Layer w8: pad.7 4075.44,2396 pad.2 4141,2395 4141,2327 pad.3 4139.5,2325.5 4139.5,2258.5 pad.4 4139,2185 4138,2184 4138,2110 pad.6
  Top Layer w20: C12.1 4012,2469 4080,2469 C11.2 4075.44,2396 4075.35,2394.89 4069.83,2323.47 pad.9 4054.18,2226.32 4054.18,2179 4054.18,2098 J5.5
IAOUT: C2.1 R10.1 R11.1 R13.1 U1.19 | length 1632.5
  Top Layer w10: v1(2376,1957) 2376,1956.46 2558.46,1774 v1(2856,1774) ; v1(2514.52,2115.52) 2509.44,2115.52 2475,2149.95 R13.1 2492.72,2192.51 2547.24,2247.04 2645.6,2247.04 2686.28,2287.71 2870.13,2287.71 2919.88,2237.96 2919.88,2215.34 2920.32,2214.91 U1.19
  Bottom Layer w12: v1(2376,1957) 2376,1967 2514.52,2105.52 v1(2514.52,2115.52) ; v1(2856,1774) 2856,1778.08 2893,1815.08 R11.1 2897.61,1827.76 R10.1 2897.55,1913.22 C2.1 C2.1
ID: J5.4
IO0: Q2.3 R18.1 R21.1 U3.25 | length 1852.1
  Top Layer w5: Q2.3 2660,2832.5 2677.5,2815 2720.43,2815 2810.21,2725.23 2810.21,2554.56 2899.98,2464.78 3027.93,2464.78 3112.15,2549 v2(3343,2549) ; v2(3552,2548) 3591.86,2508.14 3631.86,2508.14 U3.25
  Top Layer w10: v2@2349.05,2925.78 2379.22,2925.78 R21.1 ; R18.1 R18.1@2491.2,2796.61 ; v2(2536,2840) 2534.58,2840 R18.1@2491.2,2796.61 ; Q2.3@2660,2832.5 2624.11,2796.61 R18.1@2491.2,2796.61
  Bottom Layer w10: v2(3343,2549) 3343.5,2548.5 3551.5,2548.5 v2(3552,2548)
  Bottom Layer w12: v2(2330,2934) 2424,2840 v2(2536,2840)
IO2: R20.1 U3.24 | length 246
  Top Layer w8: R20.1 3455.27,2302.78 3505.85,2353.36 3505.85,2426.13 U3.24
LA: J2.1 J2.5 R4.2 R5.1 R7.1 R9.1 | length 1905.7
  Top Layer w12: R9.1 R7.1@2774.05,2147.63 ; v1(2730.76,2193.57) 2730.76,2193.35 2758.72,2165.39 2758.72,2162.96 R7.1@2774.05,2147.63 ; R7.1 R7.1@2774.05,2147.63 ; v2(3433,1730) 3472.22,1769.22 3472.22,1833.57 3488.65,1850 J2.1 3491.35,1850 3507.78,1866.43 3507.78,1921.78 3632.85,2046.85 J2.5
  Top Layer w25: R5.1 2687.04,1954 2687.04,2001 R4.2 2686.04,2057.22 2684.78,2058.47 2684.78,2109.38 2723.03,2147.63 R9.1
  Bottom Layer w12: v1(2730.76,2193.57) 2731,2193.33 2731,2114.01 2752.54,2092.47 2752.54,2020.29 2748,2015.75 2748,1820.82 2858.84,1709.98 3339.31,1709.98 3359.33,1730 v2(3433,1730)
LO+: U1.12 U3.17 | length 488.5
  Top Layer w8: U1.12 3016.75,2111.03 3037.77,2111.03 3074.44,2147.71 3074.44,2197.87 3088.41,2211.83 3155.4,2211.83 3173.43,2229.87 3201.19,2229.87 3205.88,2234.55 3205.88,2298.22 3165.67,2338.44 U3.17
LO-: U1.11 U3.18 | length 506.8
  Top Layer w8: U1.11 3016.75,2091.35 3043.54,2091.35 3085.19,2133 3148,2133 3167.99,2152.99 3167.99,2161.33 3167.5,2161.82 3167.5,2198.48 3180.89,2211.87 3210.87,2211.87 3226,2227 3226,2425.61 U3.18
MISO: J3.3 U3.31 | length 582.9
  Top Layer w8: U3.31 3660.75,2795 3679.03,2813.28 3681.98,2813.28 4019,3150.3 J3.3
MOSI: J4.1 U3.37 | length 809.8
  Top Layer w8: U3.37 3726,3095 3760,3129 v1(3791,3129) ; v2(4084,3511) 4129,3466 J4.1
  Bottom Layer w10: v1(3791,3129) 3791,3272.14 4029.86,3511 v2(4084,3511)
NetB1_1: B1.1 B1.2 R21.2 | length 494.3
  Top Layer w10: R21.2 2395,2705.2 2470.47,2629.73 2470.47,2586.65 2487.13,2570 B1.2 B1.1
NetB2_1: B2.1 B2.2 R22.2 | length 1199.1
  Top Layer w10: R22.2 2332.7,2993.27 2291,2951.57 2291,2948.18 2290,2947.18 2290,2889.16 2294.71,2884.45 2294.71,2537.42 2487.13,2345 2494.02,2345 2501,2351.98 2501,2379 2522,2400 v1(2567,2400) ; v1(2633,2291) 2687,2345 B2.1
  Bottom Layer w12: v1(2567,2400) 2567,2357 v1(2633,2291)
NetC1_1: C1.1 U1.20 | length 69.9
  Top Layer w12: C1.1 2850,2237.28 2880.94,2206.33 U1.20@2899.2,2206.33
NetC1_2: C1.2 R6.1 U1.1 | length 320.1
  Top Layer w12: R6.1 2622.72,2182.51 2685.35,2245.15 C1.2 2770,2237.28 2836.01,2171.27 2863.5,2171.27 U1.1@2863.82,2170.95
NetC2_2: C2.2 U1.7 | length 220.4
  Top Layer w10: U1.7 2920.32,2023.56 v1(2948.2,1995.68) v1@2944.91,1998.96
  Top Layer w12: v1(2948.2,1995.68) v1@2948.2,2002.24
  Bottom Layer w12: C2.2 2832.52,1985.1 2859.1,2011.68 2866.96,2011.68 2873.15,2017.87 2915.72,2017.87 2937.91,1995.68 v1(2948.2,1995.68)
NetC4_1: C4.1 R14.2 R15.2 U1.18 | length 729.1
  Bottom Layer w12: C4.1 2403.15,2522 R15.2 2611.31,2505.15 2758.04,2358.43 2910.08,2358.43 2931.64,2336.87 R14.2 2931.64,2318.56 R14.2@2953.2,2297
NetC5_2: C5.2 U1.4 | length 573.7
  Top Layer w8: v4(2825,2084) 2825,2092.66 2842.23,2109.9 2863.25,2109.9 U1.4 ; C5.2 3123.36,2178.15 3141.02,2160.48 v3(3141.02,2159.97)
  Bottom Layer w8: v4(2825,2084) 2821.26,2080.26 2819.66,2080.26 2803.26,2063.86 2803.26,2040.66 2819.66,2024.26 2842.86,2024.26 2852.6,2034 2861,2034 2881.19,2054.19 3085.57,2054.19 3144,2112.61 3144,2156.99 v3(3141.02,2159.97)
NetC7_2: C7.2 D1.C U2.3 | length 444.1
  Top Layer w30: D1.C@3083.66,3680 3074.69,3671.02 3074.69,3534.69 C7.2 3070,3522.13 3114.69,3477.44 3243.43,3477.44 3300.83,3534.84 U2.3
NetC10_1: C10.1 U4.6 | length 732
  Top Layer w8: U4.6 3909.43,2515.49 3959.49,2515.49 v1(3962,2518)
  Bottom Layer w8: C10.1 3535,2322.13 3608.13,2249 3613,2249 3615,2247 3859.31,2247 3941,2328.69 3941,2497 v1(3962,2518)
NetC14_2: C14.2 U5.20 | length 199.9
  Top Layer w8: v1(3630.81,3223.48) 3633.2,3223.48 3642.18,3214.5 3658.57,3230.89 3709.7,3230.89 3717.91,3239.09 3717.91,3259.87 U5.20
  Bottom Layer w10: C14.2 3610.29,3244 v1(3630.81,3223.48)
NetC16_2: C16.2 U5.10 | length 186.9
  Top Layer w8: U5.10 3738.72,3416.13 3738.72,3436.91 3764.93,3463.11 3803.39,3463.11 3820.69,3480.41 3820.69,3493.37 3835.31,3508 C16.2
NetD2_2: D2.2 R20.2 | length 96.7
  Top Layer w8: R20.2 3681,2215 D2.2
NetD3_1: D3.1 R23.2 | length 79.1
  Top Layer w30: D3.1@3061.38,3790.59 3062.6,3789.37 D3.1
  Top Layer w35: R23.2 2999.5,3772.5 3001,3774 3058.88,3774 3062.6,3777.72 D3.1
NetD4_2: D4.2 R3.2 | length 101.7
  Top Layer w10: R3.2 3110,2041.15 3149.41,2001.74 3149.41,1983.53 3158.19,1974.75 D4.2
NetQ1_1: Q1.1 R24.2 | length 66.2
  Top Layer w10: R24.2 2745,3060 Q1.1
NetQ2_1: Q2.1 R26.1 | length 115.2
  Top Layer w10: Q2.1 2710,2900 2710,2886.83 2760.22,2836.61 R26.1
NetR6_2: R6.2 R8.1 | length 127.7
  Top Layer w25: R6.2 2622.72,1977.79 2637.78,1962.73 2637.78,1942.59 2670.78,1909.59 2672.8,1909.59 2681.17,1901.22 R8.1
NetR7_2: R7.2 U1.2 | length 112.9
  Top Layer w10: R7.2 2775,2111.02 2780.86,2116.88 2794.32,2116.88 2827.27,2149.83 2842.89,2149.83 2843.32,2150.27
NetR9_2: R9.2 U1.3 | length 203.1
  Top Layer w8: R9.2 2726.35,2082.67 2756.1,2052.92 2793.9,2052.92 2806.72,2065.73 2806.72,2099.84 2836.46,2129.58 2863.25,2129.58 U1.3
NetR10_2: R10.2 R12.1 U1.9 | length 365.2
  Top Layer w10: v1(2940,1912) 2940,1891.8 2947.8,1884 3001.8,1884 3013.8,1896 3022.72,1887.09 3038.58,1902.95 R12.1 3038.58,1913.22 2977.2,1974.61 2977.2,2007.69 2960.12,2024.77 2960.12,2032.61 2959.25,2033.47
  Bottom Layer w12: v1(2940,1912) 2940,1899.02 2951.59,1887.43 2974.39,1910.22 R10.2
NetR25_1: R25.1 U4.26 | length 111.9
  Top Layer w8: R25.1 3818.26,2291.53 3818.26,2328.43 3834.68,2344.86 U4.26
OUT: R3.1 R11.2 R12.2 U1.10 U3.4 | length 499.9
  Top Layer w10: U1.10@2979.8,2053.97 3052.12,1981.65 R3.1 3111.42,1980.23 R12.2 3109,1902.73 3119,1892.73 3082,1855.73 v1(3082,1792)
  Bottom Layer w12: R11.2 3050.85,1823.15 v1(3082,1792)
R1: U4.2
REFOUT: C3.2
RL: J2.2 R2.2 | length 180.8
  Top Layer w12: R2.2 3209,2144.43 3216.34,2137.09 3237.94,2137.09 3286.35,2088.69 3286.35,2053.65 J2.2
RLD: C5.1 R2.1 U1.5 | length 915.6
  Top Layer w10: v1(2788.04,2000.61) 2791.48,2004.06 2824.07,2004.06 2863.82,2043.81 U1.5@2863.82,2090.35
  Top Layer w12: v1(3073.98,2082.19) 3078.31,2082.19 3082.95,2086.84 3104.69,2086.84 3118.61,2100.76 3206.39,2100.76 R2.1
  Bottom Layer w12: v1(2788.04,2000.61) 2784.98,2003.67 2784.98,2030.67 2783.26,2032.38 2783.26,2122.26 2892,2231 3063,2231 3096,2198 3096,2175 3060,2139 3060,2124.49 3070.92,2113.58 3070.92,2085.25 v1(3073.98,2082.19)
RTS: Q1.2 R26.2 U4.24 | length 1377.7
  Top Layer w5: 3768,2347.6 3782.68,2347.6 3793.25,2358.17 3793.25,2379.63 U4.24
  Top Layer w10: Q1.2 2770,2965 R26.2 2780.81,2913.39 2812.85,2881.35 v2(2813.87,2881.35) ; v1(3508.58,2578.58) 3508.58,2534.85 3541.02,2502.41 3567.48,2502.41 3722.29,2347.6 3768,2347.6
  Bottom Layer w12: v2(2813.87,2881.35) 3105.22,2590 3359.98,2590 3371.41,2578.58 v1(3508.58,2578.58)
RXD: U3.34 U4.25 | length 939.4
  Top Layer w8: v1(3503,2722) 3503,2821.7 3608.02,2926.72 3610.97,2926.72 3629.25,2945 U3.34 ; v1(3729,2304) 3729,2307.6 3734,2312.6 3766,2312.6 3783.84,2330.43 3788.85,2330.43 3814.43,2356.02 3814.43,2381.13 U4.25
  Bottom Layer w10: v1(3503,2722) 3503,2653.57 3729,2427.57 v1(3729,2304)
SCK: J4.2 U3.30 | length 781.4
  Top Layer w8: U3.30 3660.75,2745 3679.03,2763.28 3681.98,2763.28 3790.32,2871.63 3790.32,2879.12 4066.46,3155.26 4066.46,3252.46 J4.2
SCL: R1.2 U3.36 U5.23 | length 379
  Top Layer w8: U3.36 3629.25,3045 3610.97,3063.28 3608.02,3063.28 3597.54,3073.77 3597.54,3172.54 3610.5,3185.5 3641.41,3185.5 3653.91,3198 R1.2@3681.04,3198 ; R1.2 3701.36,3206.33 3717.67,3206.33 3738.07,3226.72 3764.59,3226.72 3776.96,3239.09 3776.96,3259.87 U5.23
SDA: R27.1 U3.33 U5.24 | length 491.9
  Top Layer w8: U3.33 3660.75,2895 3679.03,2913.28 3681.98,2913.28 3855.48,3086.78 R27.1 3855.48,3198.97 3805.56,3248.89 3798.33,3248.89 3797.21,3250.01 U5.24
SW: C3.1 R5.2 R8.2 R13.2 U1.6 | length 695.8
  Top Layer w12: R8.2 2753,1894.15 R5.2 2802.71,1953 2899.2,2049.49 U1.6@2899.2,2053.97
  Top Layer w25: R13.2 2466.06,1987.79 2451,1972.73 2451,1935.64 2473.08,1913.56 2569.46,1913.56 2612,1871.02 C3.1 2612,1855.28 2619.19,1848.09 2644.6,1848.09 2650.98,1841.71 2711.35,1841.71 2724.53,1854.89 2724.53,1855.61 2754,1885.08 R8.2
TXD: R25.2 U3.35 | length 899
  Top Layer w8: U3.35 3629.25,2995 3610.97,2976.72 3608.02,2976.72 3448,2816.7 3448,2568.56 3533.15,2483.41 3536.9,2483.41 3666,2354.31 R25.2
VDD: C11.1 C12.2 D1.A J1.1 J5.1 U4.7 U4.8 U4.9 | length 4214.3
  Top Layer w8: C11.1@4080,2549 C11.1
  Top Layer w20: J5.1@3949.54,1987 3949.54,2014.62 3895.43,2068.72 3862.72,2068.72 3757,1963 3757,1876.96 3848.96,1785 4157.04,1785 4208.04,1836 4208.04,1927.37 4195,1940.41 4195,2441.87 4088.87,2548 C11.1 ; C12.2 4012,2549 C11.1@4080,2549
  Top Layer w25: J1.1@2672.18,3373.84 J1.1@2683.88,3373.84 ; 2781,3529 2781,3470.96 J1.1@2683.88,3373.84 ; v2(2807,3372) 2805,3370 2680.04,3370 J1.1@2683.88,3373.84 ; v2(3804,2630) 3808.59,2630 3847.78,2590.81 3847.78,2574.9 U4.9 ; 3862.3,2568.31 U4.8 3880.65,2561.71 3888.58,2561.71 3908.31,2541.99 3916.32,2550 C12.2
  Top Layer w30: D1.A@2666.34,3680 2672.18,3674.15 J1.1@2672.18,3378.82
  Top Layer w35: 2467,3584 2672.18,3378.82 J1.1@2672.18,3373.84
  Bottom Layer w25: v2(2807,3372) 3062,3372 v2(3804,2630)
pads on no net: J2. J5.SH1 J5.SH2 J5.SH3 J5.SH4 J5.SH5 J5.SH6 U1.8 U1.13 U1.21 U3.5 U3.6 U3.7 U3.8 U3.9 U3.10 U3.11 U3.12 U3.13 U3.14 U3.16 U3.19 U3.20 U3.21 U3.22 U3.23 U3.26 U3.27 U3.32 U4.10 U4.12 U4.13 U4.14 U4.15 U4.16 U4.17 U4.18 U4.19 U4.20 U4.21 U4.22 U5.2 U5.3 U5.4 U5.5 U5.6 U5.7 U5.9 U5.12 U5.14 U5.15 U5.16 U5.17 U5.19 U5.21 U5.22

## Polygon pours and split planes (outlines as drawn)
GND on Bottom Layer "GND_L02_P000" (solid, pour order 0): 2260,3860 2265,3855 4255,3855 4255,1655 4250,1650 2250,1650 2250,3850
GND on Top Layer "GND_L01_P001" (solid, pour order 1): 2260,3860 4240,3860 4250,3850 4250,1650 2255,1650 2247,1658 2255,1666 2255,3855

## Keep-outs
Keep-Out Layer:
  lines w10: 2250,1650 2250,3850 2260,3860 4260,3860 4250,3850 4250,1650 3750,1650 2250,1650

## Other copper
Top Layer:
  region net VDD: 2678.03,3367.99 2793,3482.96 2793,3386 2809,3370 2809,3547 2807,3549 2807,3265 2790,3248
  region net VDD: 2678.03,3367.99 2678.03,3420.03 2793,3535
  region net VDD: 2369,3680 2430,3619 2430,3310
  region: 2394,3543
  region net VDD: 2369,3680 2430,3619 2430,3310 2620.04,3310 2678.03,3367.99
  region net VDD: 2678.03,3369.48 2678.03,3420.03 2793,3535 2669.26,3658.74 2669.26,3677.08
  region net VDD: 2678.03,3367.99 2678.03,3370.97 2369,3680 2666.34,3680

## Silkscreen, mask and mechanical layers (free items; w line width, h text height)
Top Overlay:
  text "META" at 3698,3748 h80
  text "CEKIRDEK" at 3657,3656 h60
  text "POWER" at 2530,3528 h50
  text "SPI" at 4131,3498 h40
  text "MOSI" at 4197,3459 h25 r270
  text "GND" at 3951,3399 h25 r90
  text "SCK" at 4197,3346 h25 r270
  text "9-12V" at 2491,3335 h40 r90
  text "3.3V" at 3953,3276 h25 r90
  text "CS" at 4194,3237 h25 r270
  text "MISO" at 3953,3163 h25 r90
  text "GND" at 2494,3154 h45 r90
  text "USB" at 3777,1693 h50

## Text inside footprints (layer, text, board x,y; h text height)
J2: Mechanical 13 "PCB EDGE" at 3736.06,1655.12 h60 r90
J5: Mechanical 13 "PCB Edge" at 4207.92,1833.31 h60